# Altium PCB ModuleConMicPCB.PcbDoc
Units mil, origin at the board's own origin, x right, y up, seen from the top; angles counter-clockwise.
Board outline 1625 x 825 mil, 2 copper layers (Top Layer, Bottom Layer); 19 components, 11 nets, 43 pads, 0 vias.
Unrouted connection lines stored in the file: 2.
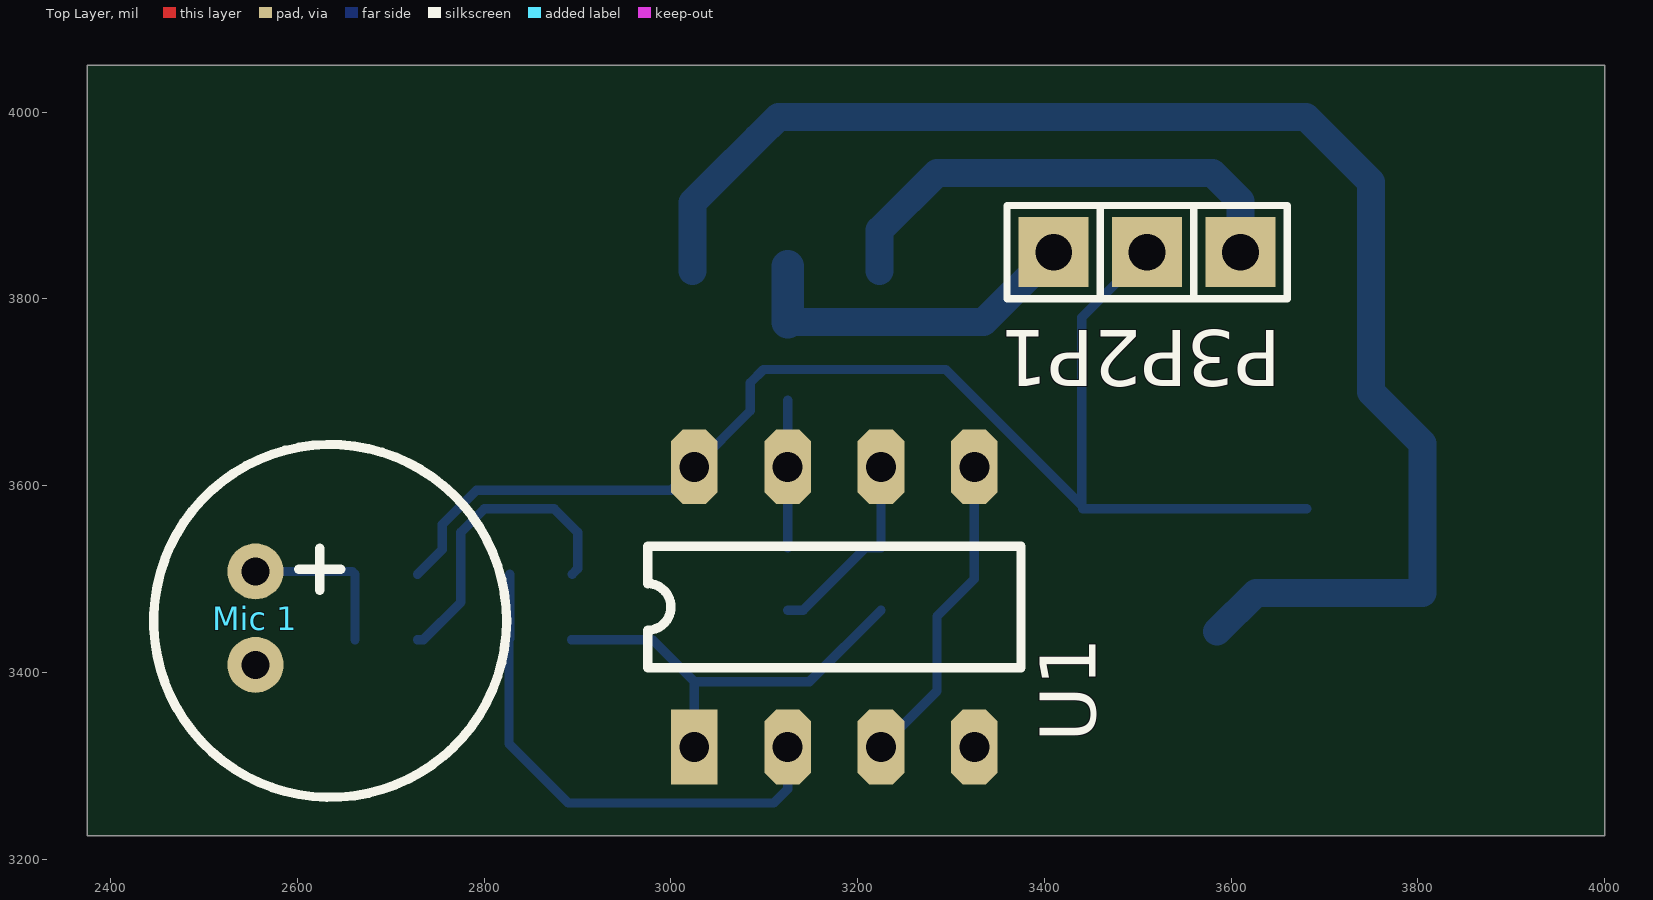
[diagram p0: Top Layer view]
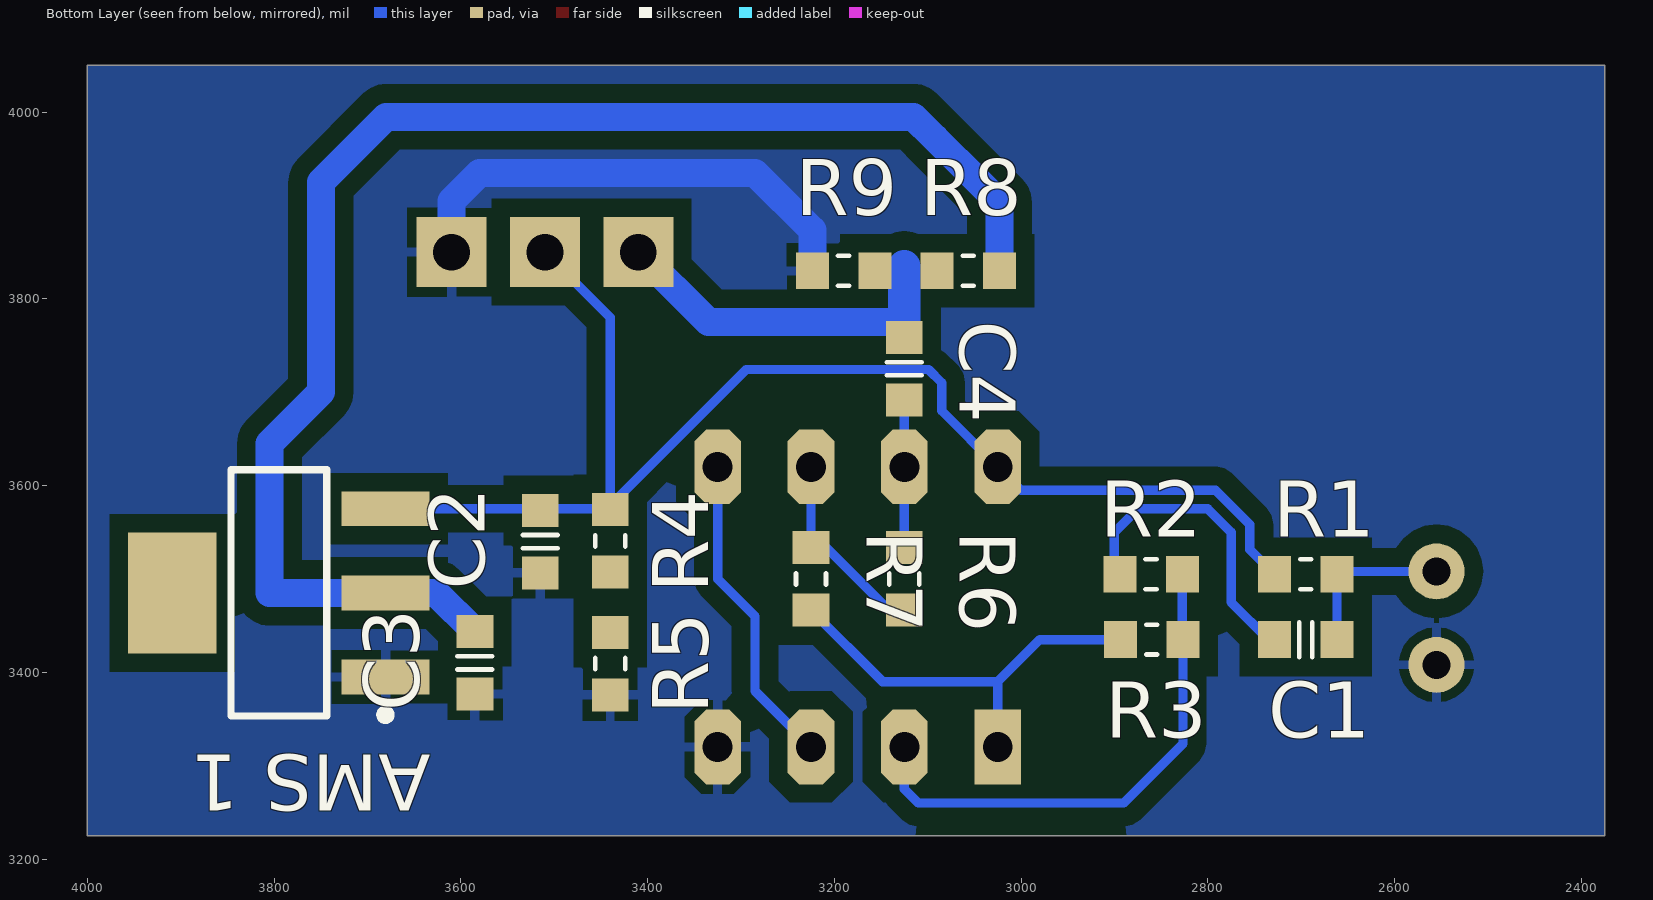
[diagram p1: Bottom Layer view, seen from below]
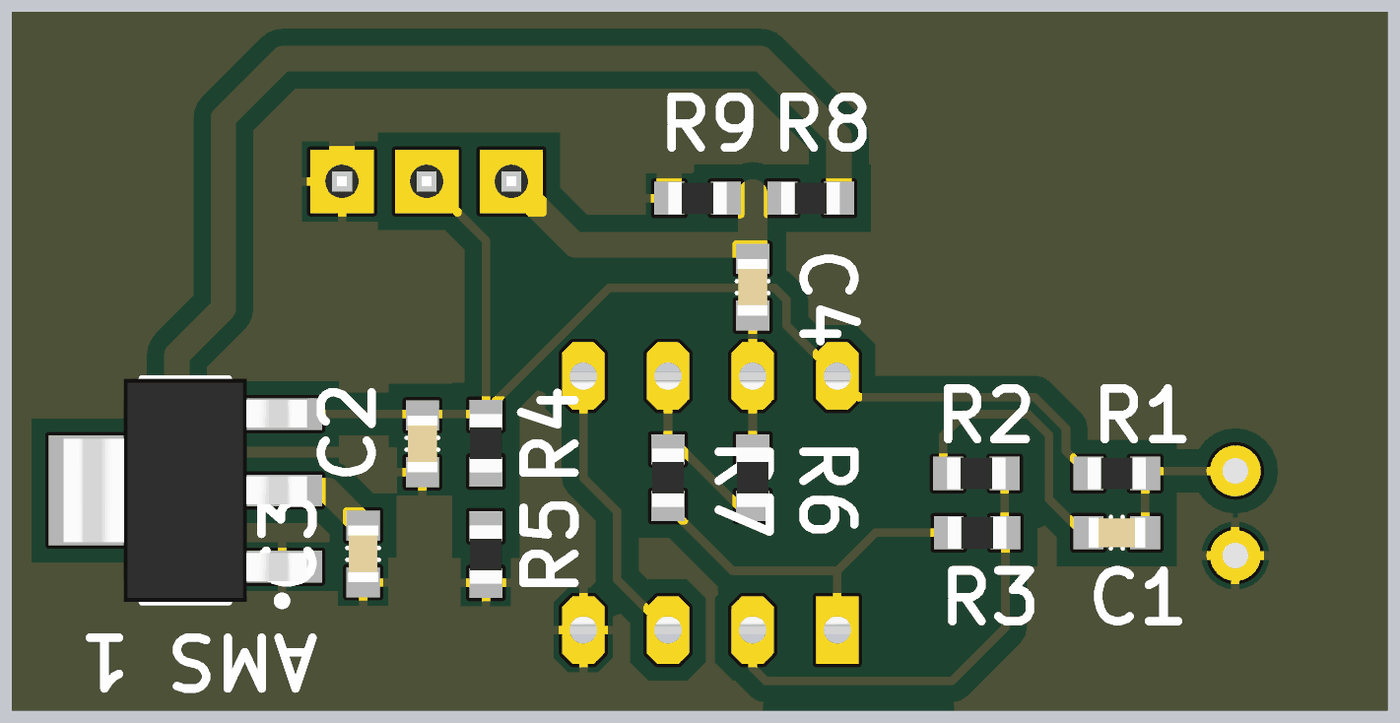
[diagram p2: 3D render of the assembled board from below, using the file's embedded part models]

## Layer stack, top to bottom
Top Layer: signal copper 1.4
Dielectric: dielectric 12.6, FR-4, Dk 4.8
Bottom Layer: signal copper 1.4

## Board outline
4000,4050 4000,3225 2375,3225 2375,4050

## Design rules (kind name [scope] priority, off if disabled: settings)
Clearance [All] p1: gap=10
ComponentClearance ComponentClearanceBottom [OnLayer('Bottom Layer') vs OnLayer('Bottom Layer')] p1: gap=10 collisioncheckmode=3 verticalgap=10 showdistances=FALSE
ComponentClearance ComponentClearanceTop [OnLayer('Top Layer') vs OnLayer('Top Layer')] p2: gap=10 collisioncheckmode=3 verticalgap=10 showdistances=FALSE
PolygonConnect [All] p1: connectstyle=Relief reliefconductorwidth=10 reliefentries=4 polygonreliefangle="90 Angle" airgapwidth=10
RoutingVias [All] p1: holewidth=28 width=50 viastyle="Through Hole" minholewidth=28 minwidth=50 maxholewidth=28 maxwidth=50
SolderMaskExpansion [All] p1: expansion=4
Width [All] p1: maxlimit=40 minlimit=8 preferedwidth=16 minimp=50.000000 maximp=50.000000 favimp=50.000000
27 further rules are at their usual default settings.

## Components (designator, comment, footprint, x,y, rotation, side; value= is the part's Value field where it differs from the comment)
"AMS 1" "AMS1117" SOT223 3795,3485 r0 bottom
C1 "Cap_0603" CAP_0603 2695,3435 r0 bottom
C2 "Cap_0603" CAP_0603 3515,3540 r90 bottom
C3 "Cap_0603" CAP_0603 3585,3410 r90 bottom
C4 "Cap_0603" CAP_0603 3125,3725 r270 bottom
"Mic 1" "Con Mic" Con_Mic_9.6mm 2635,3455 r270 top
P1 "Signal" HDR1X1_180_2.54 3410,3850 r180 top
P2 "5V" HDR1X1_180_2.54 3510,3850 r180 top
P3 "GND" HDR1X1_180_2.54 3610,3850 r180 top
R1 "Res_0603" RES_0603 2695,3505 r0 bottom
R2 "Res_0603" RES_0603 2860.75,3505 r180 bottom
R3 "Res_0603" RES_0603 2860,3435 r0 bottom
R4 "Res_0603" RES_0603 3440,3540.75 r90 bottom
R5 "Res_0603" RES_0603 3440,3409.21 r90 bottom
R6 "Res_0603" RES_0603 3125,3500 r270 bottom
R7 "Res_0603" RES_0603 3225,3500 r270 bottom
R8 "Res_0603" RES_0603 3056.54,3830 r180 bottom
R9 "Res_0603" RES_0603 3190,3830 r180 bottom
U1 "OPA2132" DIP_8 3025,3320 r90 top

## Footprints (in the part's own frame and the unit in brackets; to place one, negate y for a bottom-side part, rotate by r counter-clockwise, add the part's x,y. Pads: shape width x height; smd on the part's side, far side on the other; paste and mask are expansions set on the pad)
CAP_0603 [mm] "Chip Capacitor, Body 1.6x0.8mm, 0603, IPC Medium Density"
  rect 0.9x1 smd: 1(-0.85,0) 2(0.85,0)
  Top Layer pour cut-out: -0.4,0.6 0.4,0.6 0.4,-0.6 -0.4,-0.6
  silkscreen extent -0.18,-0.48 0.18,0.48, body extent -0.85,-0.45 0.85,0.45, height 0.89
Con_Mic_9.6mm [mil]
  round 60 hole 30: 1(-53,-80) 2(47,-80)
  silkscreen extent -189,-189 189,189, body extent -191,-190 191,192, height 264
DIP_8 [mil]
  rect 80x50 hole 32: 1(0,0)
  oct 80x50 hole 32: 2(0,-100) 3(0,-200) 4(0,-300) 5(300,-300) 6(300,-200) 7(300,-100) 8(300,0)
  silkscreen extent 85,-350 215,50, body extent -5,-350 305,50, height 210
HDR1X1_180_2.54 [mm] "Connector; Header; 2 Position"
  rect 1.905x1.905 hole 1: 1(0,0)
  silkscreen extent -1.27,-1.27 1.27,1.27, body extent -1.27,-1.27 1.27,1.27, height 7.58
RES_0603 [mm]
  rect 0.9x1 smd: 1(-0.85,0) 2(0.85,0)
  Top Layer pour cut-out: -0.4,0.6 0.4,0.6 0.4,-0.6 -0.4,-0.6
  silkscreen extent -0.15,-0.41 0.15,0.41, body extent -0.87,-0.47 0.88,0.48, height 0.54
SOT223 [mm] "SOT223, 4-Leads, Body 6.7x7.3mm (max), Pitch 2.29mm, IPC Medium Density"
  rect 2.4x0.95 smd: 1(-2.9,2.29) 2(-2.9,0) 3(-2.9,-2.29)
  rect 2.4x3.3 smd: 4(2.9,0)
  silkscreen extent -3.02,-3.35 1.3,3.44, body extent -3.65,-3.35 3.65,3.35, height 1.8

## Part data
"AMS 1": "Power"
C1 C2 C3 C4: "Capacitor"
"Mic 1": library part Con_Mic_9.7mm, "Condenser Microphone"
P1 P2 P3: library part HDR1X1_180_2.54, "Header"
R1 R2 R3 R4 R5 R6 R7 R8 R9: "Resistor"
U1: "TI BB OPA2132 - 2 op amps IC"

## Nets (pads, with @x,y where several pads share a name; then routed paths per layer and width w, separated by ;. In a path a pad name is that pad's centre, name@x,y a point inside that pad or via, vN(x,y) a via of type N, cw(c..) or ccw(c..) an arc to the next point about the centre after c; other vN are vias at no path point)
"+2.5 V": R4.1 R5.2 U1.3 U1.5 | length 341.4
  Bottom Layer w10: U1.3 3285,3380 3285,3460 3325,3500 U1.5
+3.3: "AMS 1.2" C3.2 R8.2 | length 1567.1
  Bottom Layer w30: R8.2 3023.07,3903.07 3046.05,3926.05 3092.02,3972.02 3115,3995 3680,3995 3750,3925 3750,3700 3805,3645 3805,3485 3680.83,3485 3626.54,3485 C3.2
+5: "AMS 1.3" C2.2 P2.1 R1.2 R4.2 U1.8 | length 1436.1
  Bottom Layer w10: R1.2 2755,3531.54 2755,3558.28 2791.72,3595 3000,3595 U1.8 3085,3680 3085,3710.15 3099.1,3724.25 3294.46,3724.25 3440,3578.71 3440,3780 P2.1 ; R4.2@3440.94,3575.16 3680.83,3575.16
GND: "AMS 1.1" "Mic 1.2" C2.1 C3.1 P3.1 R5.1 R9.1 U1.4 | length 522.9
  Bottom Layer w30: R9.1 3223.46,3873.46 3285,3935 3580,3935 3610,3905 P3.1
MIC_S: "Mic 1.1" C1.1 R1.1 | length 173.5
  Bottom Layer w10: 2555,3508 R1.1@2658.54,3508 ; C1.1 R1.1
NetC1_2: C1.2 R2.1 | length 331.2
  Bottom Layer w10: C1.2 2735,3435 2775,3475 2775,3550 2800,3575 2875,3575 2900,3550 2900,3510.79 R2.1
NetR2_2: R2.2 R3.1 U1.2 | length 557.8
  Bottom Layer w10: R2.2 2827.28,3435.75 R3.1 2826.54,3323.46 2890,3260 3110,3260 3125,3275 U1.2
NetR6_2: R6.2 R7.1 U1.6 | length 214.3
  Bottom Layer w10: R6.2 3141.54,3466.54 3208.46,3533.46 R7.1 U1.6
OUTA: R3.2 R7.2 U1.1 | length 451.9
  Bottom Layer w10: R3.2 2980,3435 3025,3390 ; U1.1 3025,3390 ; R7.2 3148.46,3390 3025,3390
OUTB: C4.2 R6.1 U1.7 | length 158.1
  Bottom Layer w10: R6.1 U1.7 C4.2
S: C4.1 P1.1 R8.1 R9.2 | length 376.1
  Bottom Layer w30: C4.1@3125,3775 3335,3775 P1.1
  Bottom Layer w35: C4.1@3125,3775 3125,3835
pads on no net: "AMS 1.4"

## Polygon pours and split planes (outlines as drawn)
GND on Bottom Layer "Bottom Layer-GND" (solid, remove dead copper, pour order 4): 2375,4050 2375,3225 4000,3225 4000,4050

## Silkscreen, mask and mechanical layers (free items; w line width, h text height)
Mechanical 1:
  the board outline again, w10